# Altium PCB PCB1.PcbDoc
Units mm, origin at the board's own origin, x right, y up, seen from the top; angles counter-clockwise.
Board outline 42.5 x 27.5 mm, 2 copper layers (Top Layer, Bottom Layer), stack 1.571 mm thick; 7 components, 5 nets, 22 pads, 30 vias.
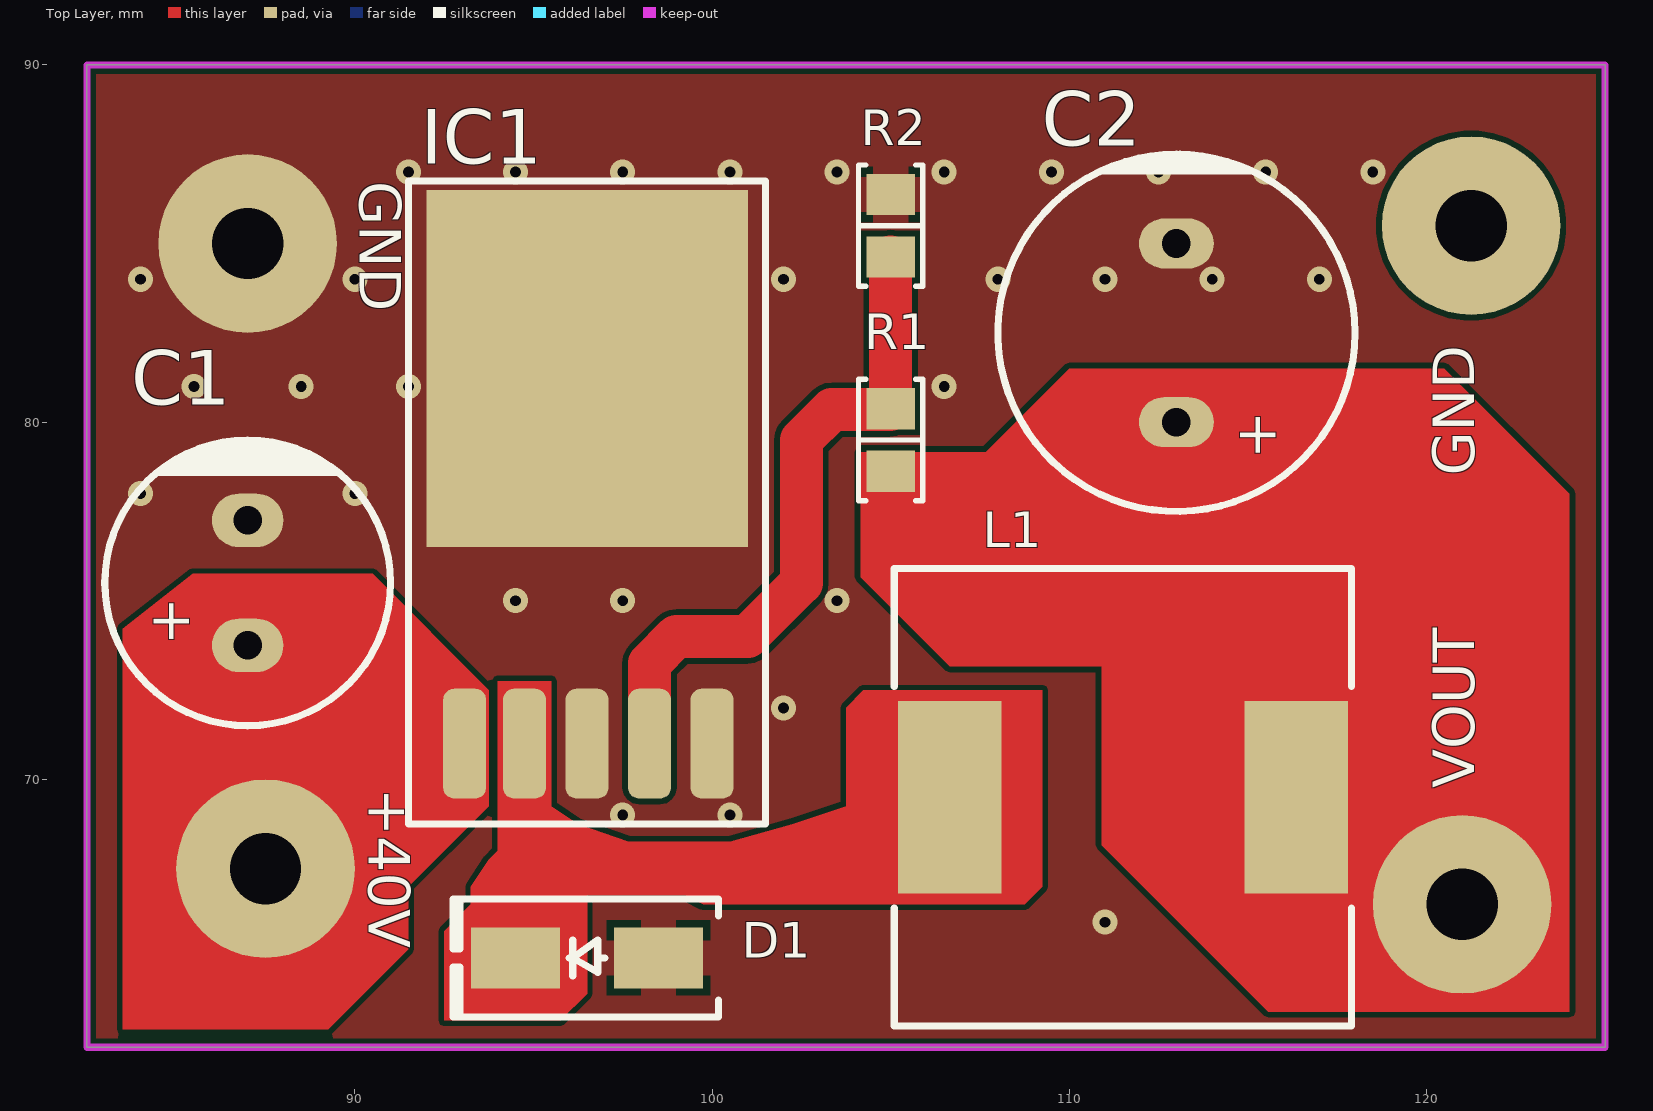
[diagram p0: Top Layer view]
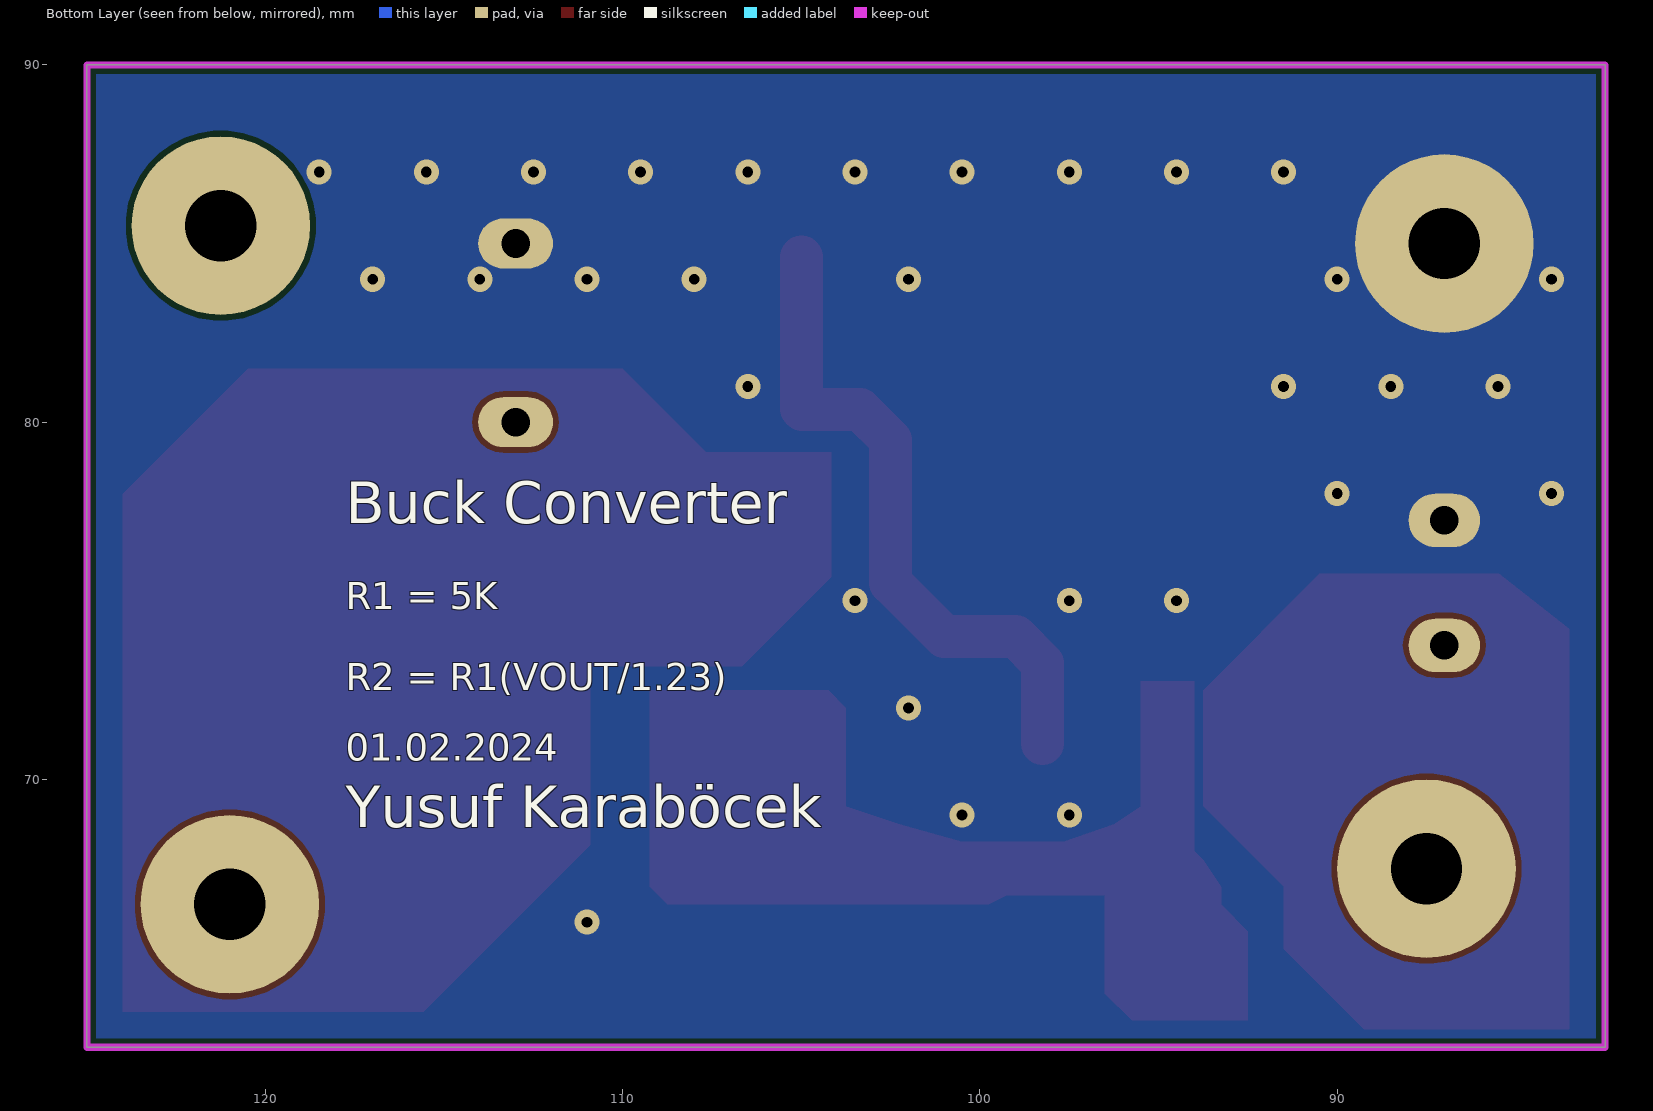
[diagram p1: Bottom Layer view, seen from below]
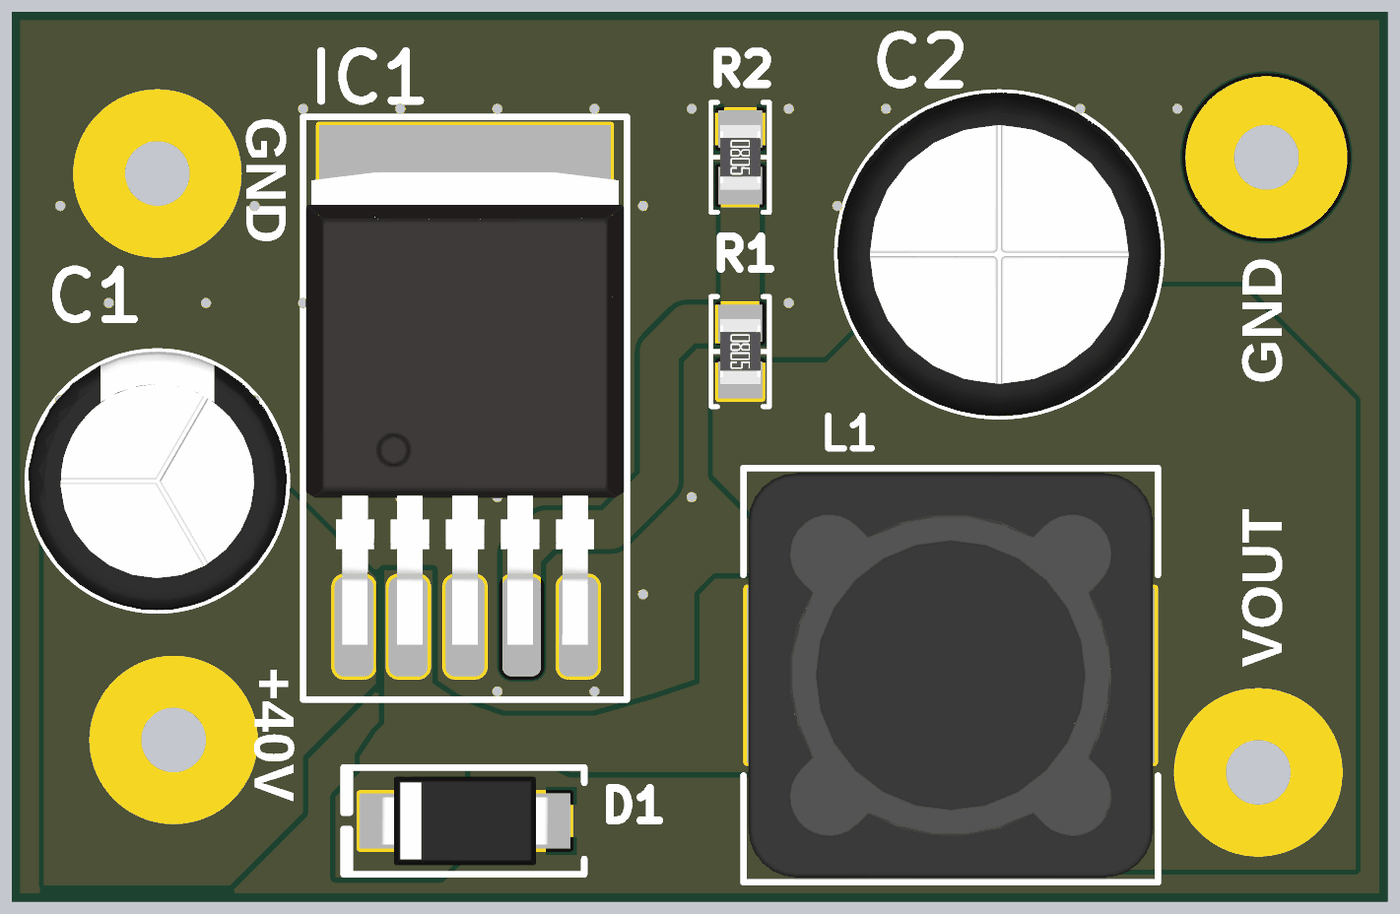
[diagram p2: 3D render of the assembled board from above, using the file's embedded part models]

## Layer stack, top to bottom
Top Solder: solder mask 0.0102, Solder Resist, Dk 3.5
Top Layer: signal copper 0.0356
Dielectric 1: dielectric 1.5, FR-4, Dk 4.8
Bottom Layer: signal copper 0.0356
Bottom Solder: solder mask 0.0102, Solder Resist, Dk 3.5

## Board outline
82.5,62.5 82.5,90 125,90 125,62.5

## Design rules (kind name [scope] priority, off if disabled: settings)
Clearance [All] p1: gap=0.152 ignorepadtopadclearanceinfootprint=FALSE
HoleSize [All] p1: absolutevalues=TRUE maxlimit=5 minlimit=0.025 maxpercent=80.000 minpercent=20.000
PolygonConnect [All] p1: thpad.connectstyle=Direct thpad.reliefconductorwidth=0.254 thpad.reliefentries=4 thpad.polygonreliefangle="90 Angle" thpad.airgapwidth=0.254 smdpad.connectstyle=Relief smdpad.reliefconductorwidth=1 smdpad.reliefentries=4 smdpad.polygonreliefangle="90 Angle" smdpad.airgapwidth=0.2 via.connectstyle=Direct via.reliefconductorwidth=0.254 via.reliefentries=4 via.polygonreliefangle="90 Angle" via.airgapwidth=0.254
RoutingVias [All] p1: holewidth=0.711 width=1.27 viastyle="Through Hole" minholewidth=0.711 minwidth=1.27 maxholewidth=0.711 maxwidth=1.27
SolderMaskExpansion [All] p1: expansion=0.102 istentingtop=FALSE
Width [All] p1: maxlimit=2 minlimit=0.152 preferedwidth=0.5
29 further rules are at their usual default settings.

## Components (designator, comment, footprint, x,y, rotation, side; value= is the part's Value field where it differs from the comment)
C1 "100 µF" "CAP AL TH D8 L3.5 H12.5" 87,75.5 r90 top
C2 "220µF" "CAP TH ALUM ELEC D10.00mm S5.00mm H17.00mm" 113,82.5 r270 top
D1 "ACDBA560-HF" "DO214AC SMA" 96.5,65 r180 top
IC1 "LM2596" D2PAK-LM2596 96.5,80 r0 top
L1 "33µH" "BOURNS SRR1280" 111.5,69.5 r0 top
R1 "10 kOhms" "RES 0805_2012" 105,79.5 r270 top
R2 "4.7 kOhms" "RES 0805_2012" 105,85.5 r270 top

## Footprints (in the part's own frame and the unit in brackets; to place one, negate y for a bottom-side part, rotate by r counter-clockwise, add the part's x,y. Pads: shape width x height; smd on the part's side, far side on the other; paste and mask are expansions set on the pad)
"BOURNS SRR1280" [mm] "Precision Wire Wound Inductor, 2-Leads, Body 12.50x12.50mm, IPC Medium Density"
  rect 2.9x5.4 smd: 1(-4.85,0) 2(4.85,0)
  silkscreen extent -6.4,-6.4 6.4,6.4, body extent -6.25,-6.25 6.25,6.25, height 7.9
"CAP AL TH D8 L3.5 H12.5" [mm] "8MM Diameter, 3.5MM Lead Spacing Aluminium Capacitor"
  oval 1.5x2 hole 0.8: 1(-1.75,0) 2(1.75,0)
  silkscreen extent -4,-4 4,4, body extent -4,-4 4,4, height 11.5
"CAP TH ALUM ELEC D10.00mm S5.00mm H17.00mm" [mm] "10mm Diameter 5mm Lead Spacing Aluminum Electrolytic Capacitors Radial, Can"
  oval 1.4x2.1 hole 0.8: 1(2.5,0) 2(-2.5,0)
  silkscreen extent -5,-5 5,5, body extent -5.01,-5 5,5, height 17
D2PAK-LM2596 [mm]
  rrect50% 1.2x3.075 smd: 1(-3.425,-9) 2(-1.75,-9) 3(0,-9) 4(1.75,-9) 5(3.5,-9)
  rect 9x10 smd: 3(0,1.5)
  silkscreen extent -5,-11.25 5,6.75, body extent -4.91,-9.56 4.91,5.04, height 4.22
"DO214AC SMA" [mm] "Molded Diode, 2-Leads, Body 4.30x2.60mm, IPC Medium Density"
  rect 2.5x1.7 smd: 1(-2,0) 2(2,0)
  silkscreen extent -3.68,-1.65 3.75,1.65, body extent -2.6,-1.37 2.6,1.37, height 2.4
"RES 0805_2012" [mm] "Chip Resistor, 2-Leads, Body 2.00x1.25mm, IPC Medium Density"
  rect 1.15x1.35 smd: 1(-0.875,0) 2(0.875,0)
  silkscreen extent -1.7,-0.9 1.7,0.9, body extent -1,-0.62 1,0.63, height 0.6

## Part data
C1: library part ECA-1JM101, "CAP ALUM 100UF 20% 63V RADIAL", Device Package="Radial, Can", Lifetime @ Temp.="2000 Hrs @ 85°C", manufacturer="Panasonic Electronic Components", Operating Temperature="-40°C ~ 85°C", Ripple Current @ High Frequency="459 mA @ 10 kHz", Ripple Current @ Low Frequency="270 mA @ 120 Hz", Supplier Part Number 1=P5193-ND, Tolerance=±20%, Voltage - Rated="63 V", Applications="General Purpose", Capacitance="100 µF", componentlink1description=Datasheet, componentlink1url=//media.digikey.com/pdf/Data%20Sheets/Panasonic%20Electronic%20Components/ECA-xxM%20Series,TypeA.pdf, componentlink2description="DigiKey Link", componentlink2url=https://www.digikey.com/en/products/detail/panasonic-electronic-components/ECA-1JM101/245052, Height - Seated (Max)="0.492\" (12.50mm)", lastupdated="31.01.2024 21:38:32", Lead Spacing="0.138\" (3.50mm)", Lifecycle Status=Active, Minimum Order=1, Mounting Type="Through Hole", Package / Case="Radial, Can", packaging=Bulk, Part Number=ECA-1JM101, Part Status=Active, partid=7225, Polarization=Polar, price=0.11, series=M-A, Size / Dimension="0.315\" Dia (8.00mm)", Supplier 1=DigiKey
C2: library part ECA-1JM221, "CAP ALUM 220UF 20% 63V RADIAL", Device Package="Radial, Can", Lifetime @ Temp.="2000 Hrs @ 85°C", manufacturer="Panasonic Electronic Components", Operating Temperature="-40°C ~ 85°C", Ripple Current @ High Frequency="765mA @ 10kHz", Ripple Current @ Low Frequency="450mA @ 120Hz", Supplier Part Number 1=P5194-ND, Tolerance=±20%, Voltage - Rated=63V, Applications="General Purpose", Capacitance=220µF, componentlink1description=Datasheet, componentlink1url=//media.digikey.com/pdf/Data%20Sheets/Panasonic%20Electronic%20Components/ECA-xxM%20Series,TypeA.pdf, componentlink2description="DigiKey Link", componentlink2url=http://digikey.com/product-detail/en/panasonic-electronic-components/ECA-1JM221/P5194-ND/245053, Height - Seated (Max)="0.669\" (17.00mm)", lastupdated="2.09.2020 01:31:20", Lead Spacing="0.197\" (5.00mm)", Lifecycle Status=Active, Minimum Order=1, Mounting Type="Through Hole", Package / Case="Radial, Can", packaging=Bulk, Part Number=ECA-1JM221, Part Status=Active, partid=11689, Polarization=Polar, price=0.47, series=M, Size / Dimension="0.394\" Dia (10.00mm)", Supplier 1=DigiKey
D1: "DIODE SCHOTTKY 60V 5A DO214AC", Part Number=ACDBA560-HF
L1: library part SRR1280-330M, "FIXED IND 33UH 3.5A 57 MOHM SMD", Part Number=SRR1280-330M
R1: library part CRGP0805F4K7, "RES 4.7K OHM 1% 1/3W 0805", Device Package="0805 (2012 Metric)", manufacturer="TE Connectivity Passive Product", Operating Temperature="-55°C ~ 155°C", Power (Watts)="0.333W, 1/3W", Resistance="4.7 kOhms", Supplier Device Package=0805, Supplier Part Number 1=A130485CT-ND, Temperature Coefficient=±100ppm/°C, Tolerance=±1%, componentlink1description=Datasheet, componentlink1url=https://www.te.com/commerce/DocumentDelivery/DDEController?Action=srchrtrv&DocNm=9-1773463-9&DocType=DS&DocLang=English, componentlink2description="DigiKey Link", componentlink2url=https://www.digikey.com/en/products/detail/te-connectivity-passive-product/CRGP0805F4K7/8577087, Composition="Thick Film", Features="Pulse Withstanding", Height - Seated (Max)="0.026\" (0.65mm)", lastupdated="31.01.2024 21:00:53", Lifecycle Status=Active, Minimum Order=1, Number of Terminations=2, Package / Case="0805 (2012 Metric)", packaging=TapeAndReel, Part Number=CRGP0805F4K7, Part Status=Active, partid=28726, price=0.02, series=CRGP, Size / Dimension="0.079\" L x 0.049\" W (2.00mm x 1.25mm)", Supplier 1=DigiKey
R2: library part CRGP0805F4K7, "RES 4.7K OHM 1% 1/3W 0805", Device Package="0805 (2012 Metric)", manufacturer="TE Connectivity Passive Product", Operating Temperature="-55°C ~ 155°C", Power (Watts)="0.333W, 1/3W", Supplier Device Package=0805, Supplier Part Number 1=A130485CT-ND, Temperature Coefficient=±100ppm/°C, Tolerance=±1%, componentlink1description=Datasheet, componentlink1url=https://www.te.com/commerce/DocumentDelivery/DDEController?Action=srchrtrv&DocNm=9-1773463-9&DocType=DS&DocLang=English, componentlink2description="DigiKey Link", componentlink2url=https://www.digikey.com/en/products/detail/te-connectivity-passive-product/CRGP0805F4K7/8577087, Composition="Thick Film", Features="Pulse Withstanding", Height - Seated (Max)="0.026\" (0.65mm)", lastupdated="31.01.2024 21:00:53", Lifecycle Status=Active, Minimum Order=1, Number of Terminations=2, Package / Case="0805 (2012 Metric)", packaging=TapeAndReel, Part Number=CRGP0805F4K7, Part Status=Active, partid=28726, price=0.02, Resistance="4.7 kOhms", series=CRGP, Size / Dimension="0.079\" L x 0.049\" W (2.00mm x 1.25mm)", Supplier 1=DigiKey

## Free pads (board coordinates)
  round 5 hole 2: GND(87,85) GND(121.25,85.5) VIN(87.5,67.5) VOUT(121,66.5)

## Via types
v1: diameter 0.7, hole 0.3, Top Layer to Bottom Layer, tented both sides, 30 vias

## Nets (pads, with @x,y where several pads share a name; then routed paths per layer and width w, separated by ;. In a path a pad name is that pad's centre, name@x,y a point inside that pad or via, vN(x,y) a via of type N, cw(c..) or ccw(c..) an arc to the next point about the centre after c; other vN are vias at no path point)
+12: C2.1 L1.2 pad.VOUT R1.2
FeedBack: IC1.4 R1.1 R2.2 | length 18.5
  Top Layer w1.2: IC1.4 98.25,73.25 99,74 101,74 102.5,75.5 102.5,79.5 103.35,80.35 104.975,80.35 R1.1 R2.2
GND: C1.2 C2.2 D1.1 IC1.3 IC1.5 pad.GND@87,85 R2.1
  other v1: 111,66 97.5,69 100.5,69 102,72 94.5,75 97.5,75 103.5,75 84,78 90,78 85.5,81 88.5,81 91.5,81 106.5,81 84,84 90,84 102,84 108,84 111,84 114,84 117,84 91.5,87 94.5,87 97.5,87 100.5,87 103.5,87 106.5,87 109.5,87 112.5,87 115.5,87 118.5,87
NetD1_2: D1.2 IC1.2 L1.1
VCC: C1.1 IC1.1 pad.VIN

## Polygon pours and split planes (outlines as drawn)
GND on Bottom Layer "GND" (solid, pour order 0): 82.5,90 125,90 125,62.5 82.5,62.5
GND on Top Layer "GND" (solid, pour order 4): 82.5,90 125,90 125,62.5 82.5,62.5

## Keep-outs
Keep-Out Layer:
  the board outline again, w0.2

## Other copper
Top Layer:
  region net VCC: 93.75,72.5 93.75,69.25 91.5,67 91.5,65.25 89.25,63 83.5,63 83.5,74.222 85.464,75.75 90.5,75.75
  region net +12: 107.66,79.16 110,81.5 120.5,81.5 124,78 124,63.5 115.571,63.5 110.91,68.16 110.91,73.16 106.66,73.16 104.16,75.66 104.16,79.16 105.41,79.16
  region net NetD1_2: 94,72.75 94,68 93.75,67.75 93.25,67 93.25,66.5 92.5,65.75 92.5,63.25 95.75,63.25 96.5,64 96.5,66.75 99.25,66.75 99.75,66.5 100.5,66.5 108.75,66.5 109.25,67 109.25,72.488 104.238,72.488 103.75,72 103.75,69.25 102.25,68.75 100.5,68.25 97.667,68.25 96.25,68.75 95.5,69.25 95.5,72.75 95,72.75

## Silkscreen, mask and mechanical layers (free items; w line width, h text height)
Top Overlay:
  text "GND" at 89.75,86.75 h2 r270
  text "GND" at 121.726,78.5 h2 r90
  text "+40V" at 90,69.75 h2 r270
  text "VOUT" at 121.726,69.75 h2 r90
Bottom Overlay:
  text "Buck Converter" at 117.75,76.772 h2
  text "R1 = 5K" at 117.75,74.516 h1.3
  text "R2 = R1(VOUT/1.23)" at 117.75,72.245 h1.3
  text "01.02.2024" at 117.75,70.266 h1.3
  text "Yusuf Karaböcek" at 117.752,68.27 h2

## Text inside footprints (layer, text, board x,y; h text height)
C1: Top Overlay "+" at 85.75,73.75 h2 r90
C2: Top Overlay "+" at 114.4,80.3 h2 r270